# Altium PCB PCB.PcbDoc (part 1 of 2)
Units mm, origin at the board's own origin, x right, y up, seen from the top; angles counter-clockwise.
Board outline 75 x 95 mm, 2 copper layers (Top Layer, Bottom Layer); 84 components, 62 nets, 346 pads, 109 vias.
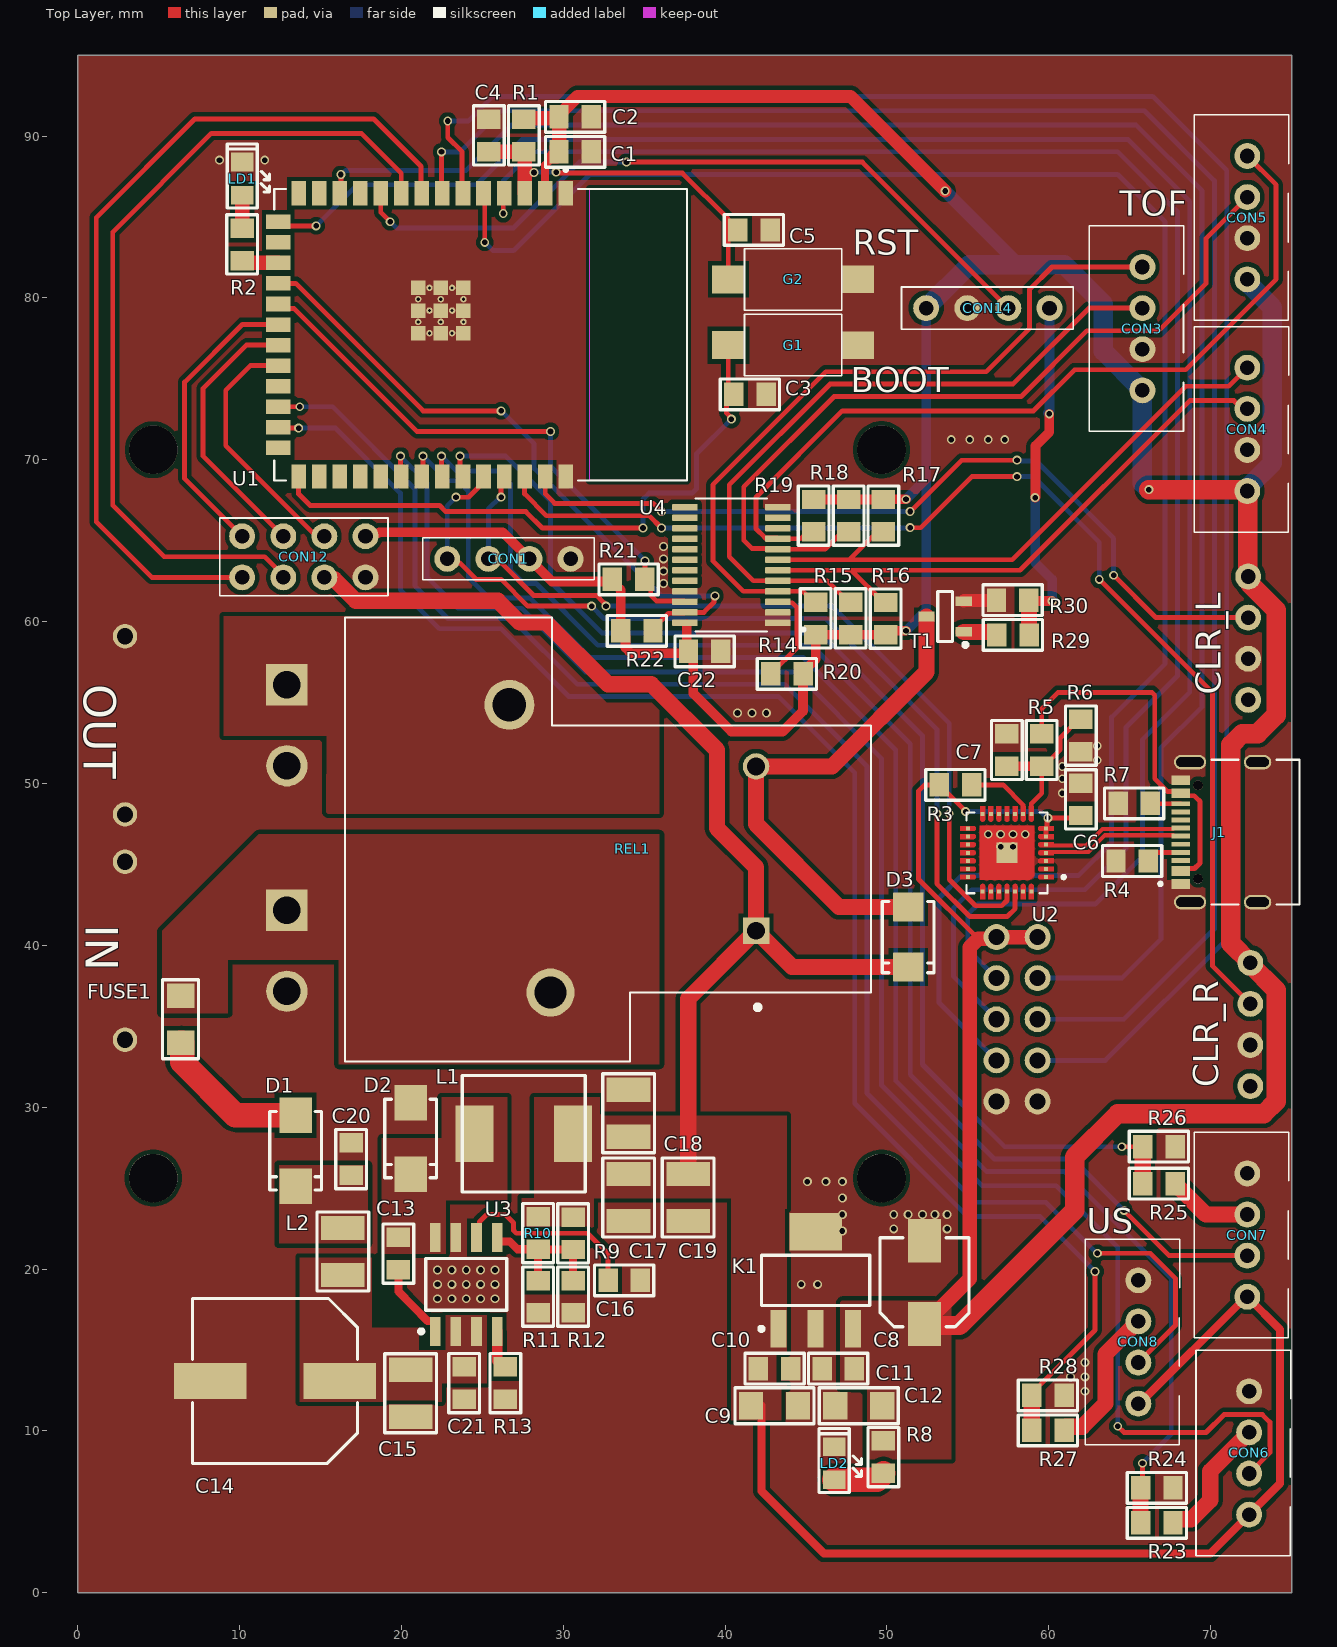
[diagram p0: Top Layer view]
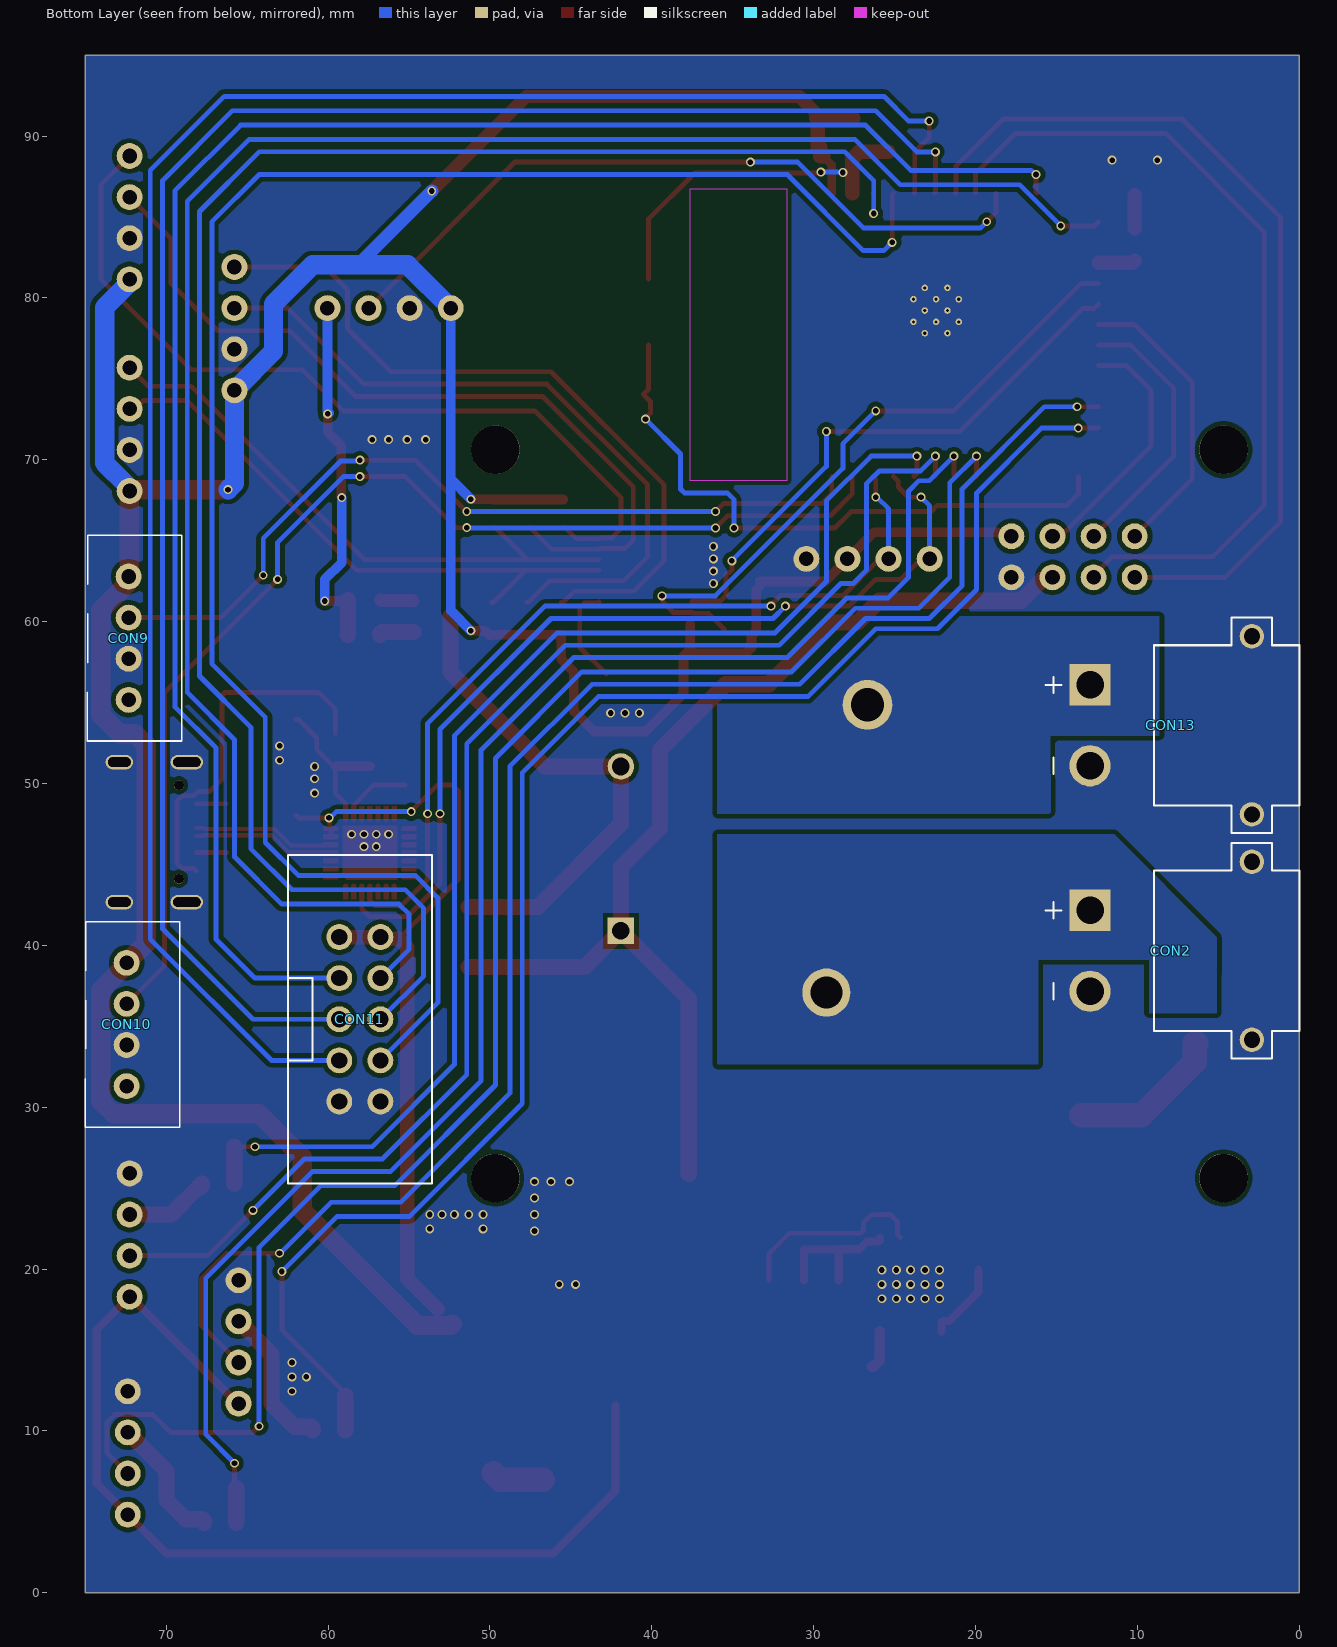
[diagram p1: Bottom Layer view, seen from below]

## Layer stack, top to bottom
Top Solder: solder mask 0.0102, Solder Resist, Dk 3.5
Top Layer: signal copper 0.0356
Dielectric 1: dielectric 0.32, FR-4, Dk 4.8
Bottom Layer: signal copper 0.0356
Bottom Solder: solder mask 0.0102, Solder Resist, Dk 3.5

## Board outline
0.001,0 75.002,0 75.002,94.996 0.001,94.996

## Design rules (kind name [scope] priority, off if disabled: settings)
AssemblyTestPointUsage [All] p1: isadvanced=TRUE
AssemblyTestpoint [All] p1: isadvanced=TRUE testpointundercomponent=TRUE minsize=1.016 maxsize=2.54 preferedsize=1.524 minholesize=0 maxholesize=1.016 preferedholesize=0.813 testpointgrid=0.025 usegrid=TRUE gridtolerance=0 allowsidetop=TRUE allowsidebottom=TRUE
Clearance Clearance_1 [InNamedPolygon('+3.3_L01_P004') Or InNamedPolygon('+5_L01_P003') Or InNamedPolygon('+12_L01_P008') Or InNamedPolygon('GND_L01_P009') Or InNamedPolygon('NETC13_2_L01_P001') Or InNamedPolygon('NETC14_1_L01_P002') Or InNamedPolygon('NETC20_2_L01_P000') Or InNamedPolygon('NETCON13_P_L01_P007') Or InNamedPolygon('+12_L02_P005') Or InNamedPolygon('GND_L02_P010') Or InNamedPolygon('NETCON13_P_L02_P006')] p1: isadvanced=TRUE gap=0.254 ignorepadtopadclearanceinfootprint=FALSE except(0.28: Arc-Poly Track-Poly SMDPad-Poly THPad-Poly Via-Poly Fill-Poly Poly-Poly)
Clearance Clearance_1 [OnMid vs OnMid] p2: gap=0.15 ignorepadtopadclearanceinfootprint=FALSE except(0.127: Arc-Arc Arc-Track Arc-Text Track-Track Track-Text Text-Text; 0.2: Arc-Hole Track-Hole SMDPad-Hole THPad-Hole Via-Hole Fill-Hole Poly-Hole Region-Hole Text-Hole; 0.254: Hole-Hole) sourcerule=42 cellrowname=All cellrowtype=0 cellcolname=All cellcoltype=0 innerlayers=TRUE
Clearance Clearance_2 [(ExistsOnLayer('Top Layer') Or ExistsOnLayer('Bottom Layer')) vs (ExistsOnLayer('Top Layer') Or ExistsOnLayer('Bottom Layer'))] p3: gap=0.15 ignorepadtopadclearanceinfootprint=FALSE except(0.127: Arc-Arc Arc-Track Arc-Text Track-Track Track-Text Text-Text; 0.2: Arc-Hole Track-Hole SMDPad-Hole THPad-Hole Via-Hole Fill-Hole Poly-Hole Region-Hole Text-Hole; 0.254: Hole-Hole) sourcerule=42 cellrowname=All cellrowtype=0 cellcolname=All cellcoltype=0 outerlayers=TRUE
Clearance [All] p4: gap=0.254 ignorepadtopadclearanceinfootprint=FALSE ismatrix=TRUE
ComponentClearance [All] p1: isadvanced=TRUE gap=0.254 collisioncheckmode=3 verticalgap=0.254 showdistances=FALSE
DiffPairsRouting "Schematic Differential Pairs Routing" [InDifferentialPairClass('All Differential Pairs')] p1: maxlimit=0.127 minlimit=0.127 mostfreqgap=0.127 toplayer_minwidth=0.255 toplayer_maxwidth=0.255 toplayer_prefwidth=0.255 bottomlayer_minwidth=0.255 bottomlayer_maxwidth=0.255 bottomlayer_prefwidth=0.255 maxuncoupledlength=12.7
DiffPairsRouting [All] p2: maxlimit=0.254 minlimit=0.254 mostfreqgap=0.254 toplayer_minwidth=0.381 toplayer_maxwidth=0.381 toplayer_prefwidth=0.381 bottomlayer_minwidth=0.381 bottomlayer_maxwidth=0.381 bottomlayer_prefwidth=0.381 maxuncoupledlength=12.7
FabricationTestPointUsage [All] p1: isadvanced=TRUE valid=0 allowmultiple=FALSE
FabricationTestpoint [All] p1: isadvanced=TRUE side=3 testpointundercomponent=TRUE minsize=1.016 maxsize=2.54 preferedsize=1.524 minholesize=0 maxholesize=1.016 preferedholesize=0.813 testpointgrid=0.025 allowsidetop=TRUE allowsidebottom=TRUE usegrid=TRUE gridtolerance=0
FanoutControl Fanout_BGA [IsBGA] p1: isadvanced=TRUE bgadir=Out bgaviamode=Centered fanoutstyle=Auto fanoutdirection=Alternating viagrid=0.025 // Fanout_BGA (Default Rule)
FanoutControl Fanout_LCC [IsLCC] p2: isadvanced=TRUE bgadir=Out bgaviamode=Centered fanoutstyle=Auto fanoutdirection=Alternating viagrid=0.025 // Fanout_LCC (Default Rule)
FanoutControl Fanout_SOIC [IsSOIC] p3: isadvanced=TRUE bgadir=Out bgaviamode=Centered fanoutstyle=Auto fanoutdirection=Alternating viagrid=0.025 // Fanout_SOIC (Default Rule)
FanoutControl Fanout_Small [(CompPinCount < 5)] p4: isadvanced=TRUE bgadir=Out bgaviamode=Centered fanoutstyle=Auto fanoutdirection=OutThenIn viagrid=0.025 // Fanout_Small (Default Rule)
FanoutControl Fanout_Default [All] p5: isadvanced=TRUE bgadir=Out bgaviamode=Centered fanoutstyle=Auto fanoutdirection=Alternating viagrid=0.025 // Fanout_Default (Default Rule)
Height [All] p1: isadvanced=TRUE minheight=0 maxheight=25.4 prefheight=12.7
HoleSize [All] p1: isadvanced=TRUE absolutevalues=TRUE maxlimit=6.3 minlimit=0.2 maxpercent=80.000 minpercent=20.000
HoleToHoleClearance [All] p1: isadvanced=TRUE gap=0.3 allowstackedmicrovias=TRUE
LayerPairs [All] p1: isadvanced=TRUE enforce=TRUE
MinimumSolderMaskSliver [All] p1: isadvanced=TRUE minsoldermaskwidth=0
NetAntennae [All] p1: isadvanced=TRUE netantennaetolerance=0
PasteMaskExpansion [All] p1: isadvanced=TRUE expansion=0
PlaneClearance [All] p1: isadvanced=TRUE clearance=0.508
PlaneConnect [All] p1: isadvanced=TRUE planeconnectstyle=Relief reliefexpansion=0.508 reliefentries=4 reliefconductorwidth=0.254 reliefairgap=0.254
PolygonConnect [All] p1: connectstyle=Direct reliefconductorwidth=0.254 reliefentries=4 polygonreliefangle="90 Angle" airgapwidth=0.254
RoutingCorners [All] p1: isadvanced=TRUE cornerstyle=45-Degree minsetback=2.54 maxsetback=2.54
RoutingPriority [All] p1: isadvanced=TRUE routingpriority=0
RoutingVias [All] p1: holewidth=0.35 width=0.55 viastyle="Through Hole" minholewidth=0.35 minwidth=0.55 maxholewidth=0.35 maxwidth=0.55
ShortCircuit [All] p1: isadvanced=TRUE allowed=FALSE
SilkToSilkClearance [All] p1: isadvanced=TRUE silktosilkclearance=0.127
SilkToSolderMaskClearance [IsPad] p1: isadvanced=TRUE minsilkscreentomaskgap=0 clearancetoexposedcopper=TRUE
SolderMaskExpansion [All] p1: isadvanced=TRUE expansion=0.051 istentingtop=FALSE
SupplyNets "Schematic Supply Nets_3" [InNet('+12')] p1: isadvanced=TRUE voltage=0.000
SupplyNets "Schematic Supply Nets_2" [InNet('+5')] p2: isadvanced=TRUE voltage=0.000
SupplyNets "Schematic Supply Nets_1" [InNet('+3.3')] p3: isadvanced=TRUE voltage=0.000
SupplyNets "Schematic Supply Nets" [InNet('GND')] p4: isadvanced=TRUE voltage=0.000
UnRoutedNet [All] p1: isadvanced=TRUE
UnpouredPolygon [All] p1: isadvanced=TRUE
Width [All] p1: maxlimit=5.008 minlimit=0.127 preferedwidth=0.254 minimp=50.000000 maximp=50.000000 favimp=50.000000
3 further rules are at their usual default settings.

## Classes and differential pairs
component class Killswitch: CON14 D3 R29 R30 REL1 T1
component class Power: C8 C9 C10 C11 C12 C13 C14 C15 C16 C17 C18 C19 C20 C21 D1 D2 FUSE1 K1 L1 L2 LD2 R8 R9 R10 R11 R12 R13 U3
component class MCU: C1 C2 C3 C4 C5 C6 C7 CON1 G1 G2 J1 LD1 R1 R2 R3 R4 R5 R6 R7 U1 U2
component class Interface: C22 CON2 CON3 CON4 CON5 CON6 CON7 CON8 CON9 CON10 CON11 CON12 CON13 R14 R15 R16 R17 R18 R19 R20 R21 R22 R23 R24 R25 R26 R27 R28 U4
differential pair D: +D_P -D_N

## Components (designator, comment, footprint, x,y, rotation, side; value= is the part's Value field where it differs from the comment)
C1 "100nF" CAP_0805 30.734,89.027 r180 top
C2 "10uF" CAP_0805 30.734,91.186 r180 top
C3 "100nF" CAP_0805 41.529,74.041 r180 top
C4 "1uF" CAP_0805 25.4,90.043 r270 top
C5 "100nF" CAP_0805 41.783,84.201 r180 top
C6 "10uF" CAP_0805 61.976,49.022 r270 top
C7 "1uF" CAP_0805 57.404,52.07 r270 top
C8 "10uf" CAP_CAN_D5MM 52.324,19.177 r90 top
C9 "1uF" CAP_1206 43.053,11.557 r180 top
C10 "100nF" CAP_0805 43.053,13.843 r180 top
C11 "100nF" CAP_0805 46.99,13.843 r0 top
C12 "1uF" CAP_1206 48.26,11.557 r0 top
C13 "100nF 50V" CAP_0805 19.812,20.955 r90 top
C14 "47uf 100v" CAP_CAN_D10mm 12.192,13.081 r180 top
C15 "10uF 100V" CAP_1210 20.574,12.319 r90 top
C16 "100nF 50V" CAP_0805 33.766,19.304 r180 top
C17 "CS3225X7R476K160NRL" CAP_1210 34.036,24.418 r90 top
C18 "CS3225X7R476K160NRL" CAP_1210 34.036,29.625 r270 top
C19 "CS3225X7R476K160NRL" CAP_1210 37.719,24.418 r90 top
C20 "100nF 100V" CAP_0805 16.891,26.797 r270 top
C21 "100nF 100V" CAP_0805 23.876,12.954 r90 top
C22 "100nF" CAP_0805 38.735,58.166 r0 top
CON1 "1x4 2.54mm THT" CON_1x4_2.54MM_THT 26.67,63.881 r270 top
CON2 "Changzhou Amass Elec XT30PW-M30.G.Y" XT30PW-M30.G.Y 7.112,39.79 r270 bottom
CON3 "HX2.54mm connector" CON_1x4_HX2.54mm#1 65.405,78.105 r180 top
CON4 "HX2.54mm connector" CON_1x4_HX2.54mm#1 71.882,71.882 r180 top
CON5 "HX2.54mm connector" CON_1x4_HX2.54mm#1 71.882,84.963 r180 top
CON6 "HX2.54mm connector" CON_1x4_HX2.54mm#2 72.009,8.636 r180 top
CON7 "HX2.54mm connector" CON_1x4_HX2.54mm#1 71.882,22.098 r180 top
CON8 "HX2.54mm connector" CON_1x4_HX2.54mm#1 65.151,15.494 r180 top
CON9 "HX2.54mm connector" CON_1x4_HX2.54mm#2 71.952,58.979 r180 bottom
CON10 "HX2.54mm connector" CON_1x4_HX2.54mm#2 72.079,35.113 r180 bottom
CON11 "BOOMELE(Boom Precision Elec) 2.54-2*5P" CON_IDC_2x5_2.54 56.769,40.513 r270 bottom
CON12 "2x4 2.54mm THT" CON_2x4_2.54MM_THT 13.97,64.008 r0 top
CON13 "Changzhou Amass Elec XT30PW-M30.G.Y" XT30PW-M30.G.Y 7.112,53.721 r270 bottom
CON14 "1x4 2.54mm THT" CON_1x4_2.54MM_THT 56.261,79.375 r270 top
D1 "SS510F" SMAF 13.462,27.305 r90 top
D2 "SS510F" SMAF 20.574,28.067 r90 top
D3 "SS16" DO-214AC 51.308,40.513 r90 top
FUSE1 "4A" FUSE_1206 6.35,35.433 r270 top
G1 "Push_Button" Push_Button 44.196,77.089 r180 top
G2 "Push_Button" Push_Button 44.196,81.153 r180 top
J1 "SHOU HAN TYPE-C 16PIN 2MD(073)" HRO_TYPE-C-31-M-12 72.898,46.997 r90 top
K1 "MIC39100-3.3WS" SOT223-4 45.593,19.304 r90 top
L1 "FXL0630-8R2-M" IND_FXL06 27.559,28.355 r0 top
L2 "10uH 1.2A" IND_1210 16.383,21.082 r270 top
LD1 "LED_0805" LED_0805 10.16,87.376 r270 top
LD2 "LED_0805" LED_0805 46.736,8.001 r270 top
R1 "10k" RES_0805 27.559,90.043 r90 top
R2 "*" RES_0805 10.16,83.312 r270 top
R3 "1k" RES_0805 54.229,49.911 r180 top
R4 "*" RES_0805 65.151,45.212 r180 top
R5 "22.1k" RES_0805 59.563,52.07 r90 top
R6 "47.5k" RES_0805 61.976,52.959 r270 top
R7 "*" RES_0805 65.278,48.768 r0 top
R8 "10k" RES_0805 49.784,8.382 r90 top
R9 "10k" RES_0805 30.607,22.209 r90 top
R10 "NC" RES_0805 28.448,22.225 r90 top
R11 "2k" RES_0805 28.448,18.288 r270 top
R12 "15k" RES_0805 30.607,18.288 r270 top
R13 "10k" RES_0805 26.416,12.954 r90 top
R14 "5k" RES_0805 45.593,60.198 r270 top
R15 "5k" RES_0805 47.752,60.198 r270 top
R16 "5k" RES_0805 49.911,60.182 r270 top
R17 "5k" RES_0805 49.784,66.548 r90 top
R18 "5k" RES_0805 47.625,66.548 r90 top
R19 "5k" RES_0805 45.466,66.548 r90 top
R20 "10k" RES_0805 43.815,56.769 r0 top
R21 "5k" RES_0805 34.036,62.611 r180 top
R22 "5k" RES_0805 34.544,59.436 r180 top
R23 "1k" RES_0805 66.675,4.318 r0 top
R24 "1k" RES_0805 66.675,6.477 r180 top
R25 "1k" RES_0805 66.802,25.273 r0 top
R26 "1k" RES_0805 66.802,27.559 r180 top
R27 "1k" RES_0805 59.944,10.033 r0 top
R28 "1k" RES_0805 59.944,12.192 r180 top
R29 "470" RES_0805 57.785,59.177 r180 top
R30 "4k7" RES_0805 57.769,61.336 r180 top
REL1 "Songle Relay SLA-05VDC-SL-A" TE_1-1393210-3 41.91,40.894 r90 top
T1 "DMN3404L-7" SOT23-3 53.594,60.32 r0 top
U1 "ESPRESSIF ESP32-S3-WROOM-1-N16R2" XCVR_ESP32-S3-WROOM-1-N16R2 24.892,77.724 r270 top
U2 "SILICON LABS CP2102N-A02-GQFN28R" IC_CP2102N-A02-GQFN28R 57.417,45.72 r180 top
U3 "LMR16030SDDAR" SOIC8_T 24.003,19.05 r90 top
U4 "TI TCA9548APWR" SOP65P640X120-24N 40.386,63.5 r180 top

## Footprints (in the part's own frame and the unit in brackets; to place one, negate y for a bottom-side part, rotate by r counter-clockwise, add the part's x,y. Pads: shape width x height; smd on the part's side, far side on the other; paste and mask are expansions set on the pad)
CAP_0805 [mm] "Chip Capacitor, 2-Leads, Body 2,03x1,35mm, IPC Medium Density"
  rect 1.2x1.45 smd: 1(-1,0) 2(1,0)
  silkscreen extent -1.83,-0.95 1.83,0.95, body extent -1.02,-0.7 1.02,0.7, height 1.3
CAP_1206 [mm] "Chip Capacitor, 2-Leads, Body 3,05x1,56mm, IPC Medium Density"
  rect 1.5x1.7 smd: 1(-1.45,0) 2(1.45,0)
  silkscreen extent -2.44,-1.11 2.44,1.11, body extent -1.53,-0.8 1.53,0.8, height 0.8
CAP_1210 [mm] "Chip Capacitor, 2-Leads, Body 3,05x1,56mm, IPC Medium Density"
  rect 1.5x2.7 smd: 1(-1.45,0) 2(1.45,0)
  silkscreen extent -2.44,-1.6 2.44,1.6, body extent -1.7,-1.4 1.7,1.4, height 2.5
CAP_CAN_D5MM [mm] "Aluminum Electrolytic Capacitor, Body 5,40x5,40x5,50mm, IPC Low Density"
  rect 2.7x2.05 smd: 1(-2.575,0) 2(2.575,0)
  silkscreen extent -2.75,-2.75 2.75,2.75, body extent -2.75,-2.75 2.75,2.75, height 5.5
CAP_CAN_D10mm [mm] "Aluminum Electrolytic Capacitor, Body 5,40x5,40x5,50mm, IPC Low Density"
  rect 4.5x2.2 smd: 1(-4,0) 2(4,0)
  silkscreen extent -5.1,-5.1 5.1,5.1, body extent -5,-5 5,5, height 10.4
CON_1x4_2.54MM_THT [mm] "Chip Resistor, 2-Leads, Body 5,20x3,30mm, IPC Medium Density"
  round 1.6 hole 0.9: 1(0,3.78) 2(0,1.24) 3(0,-1.3) 4(0,-3.84)
  silkscreen extent -1.3,-5.36 1.3,5.24, body extent -1,-5.06 1,4.94, height 6.3
CON_1x4_HX2.54mm#1 [mm]
  round 1.6 hole 0.9: 1(-0.381,3.81) 2(-0.381,1.27) 3(-0.381,-1.27) 4(-0.381,-3.81)
  silkscreen extent -2.94,-6.35 2.9,6.35, body extent -2.63,-6.07 2.61,6.02, height 6.3
CON_1x4_HX2.54mm#2 [mm]
  round 1.6 hole 0.9: 1(-0.37,3.81) 2(-0.37,1.27) 3(-0.37,-1.27) 4(-0.37,-3.81)
  silkscreen extent -2.93,-6.35 2.91,6.35, body extent -2.62,-6.07 2.62,6.02, height 6.3
CON_2x4_2.54MM_THT [mm]
  round 1.6 hole 0.9: 1(-3.81,1.27) 2(-3.81,-1.27) 3(-1.27,1.27) 4(-1.27,-1.27) 5(1.27,1.27) 6(1.27,-1.27) 7(3.81,1.27) 8(3.81,-1.27)
  silkscreen extent -5.2,-2.4 5.2,2.4, body extent -5,-2.2 5,2.2, height 8.3
CON_IDC_2x5_2.54 [mm]
  round 1.6 hole 1: 1(0,0) 2(2.54,0) 3(5.08,0) 4(7.62,0) 5(10.16,0) 6(0,-2.54) 7(2.54,-2.54) 8(5.08,-2.54) 9(7.62,-2.54) 10(10.16,-2.54)
  silkscreen extent -5.08,-5.72 15.24,3.18, body extent -5.08,-5.72 15.27,3.18, height 0.9
DO-214AC [mm] "SODFL, 2-Leads, Body 1,30x2,50mm, IPC Medium Density"
  rect 1.8x1.9 smd: 1(-1.85,0) 2(1.85,0)
  silkscreen extent -2.2,-1.6 2.2,1.6, body extent -2,-1.4 2,1.4, height 2.3
FUSE_1206 [mm]
  rect 1.5x1.7 smd: 1(-1.45,0) 2(1.45,0)
  silkscreen extent -2.44,-1.11 2.44,1.11, body extent -1.53,-0.8 1.53,0.8, height 0.8
HRO_TYPE-C-31-M-12 [mm]
  rect 0.6x1.14 smd mask+0.05: A1_B12(-3.2,4.75) A4_B9(-2.4,4.75) B1_A12(3.2,4.75) B4_A9(2.4,4.75)
  rect 0.3x1.14 smd mask+0.05: A5(-1.25,4.75) A6(-0.25,4.75) A7(0.25,4.75) A8(1.25,4.75) B5(1.75,4.75) B6(0.75,4.75) B7(-0.75,4.75) B8(-1.75,4.75)
  oval 0.9x2 hole 0.6 slot 1.7 at 90 deg: S1(-4.325,4.17) S2(4.325,4.17)
  oval 0.9x1.7 hole 0.6 slot 1.4 at 90 deg: S3(-4.325,0) S4(4.325,0)
  round 0.6 hole 0.6 unplated: ""(-2.89,3.68) ""(2.89,3.68)
  silkscreen extent -4.47,-2.6 4.47,6.1, body extent -4.47,-2.6 4.47,5.31, height 3.31
IC_CP2102N-A02-GQFN28R [mm]
  rect 0.25x0.25 smd paste-1 mask+0: 1(-2.4,1.5) 2(-2.4,1) 3(-2.4,0.5) 4(-2.4,0) 5(-2.4,-0.5) 6(-2.4,-1) 7(-2.4,-1.5) 8(-1.5,-2.4) 9(-1,-2.4) 10(-0.5,-2.4) 11(0,-2.4) 12(0.5,-2.4) 13(1,-2.4) 14(1.5,-2.4) 15(2.4,-1.5) 16(2.4,-1) 17(2.4,-0.5) 18(2.4,0) 19(2.4,0.5) 20(2.4,1) 21(2.4,1.5) 22(1.5,2.4) 23(1,2.4) 24(0.5,2.4) 25(0,2.4) 26(-0.5,2.4) 27(-1,2.4) 28(-1.5,2.4)
  rect 1.27x1.27 smd paste+0.424 mask+0: 29(0,0)
  Top Layer region: -2.059,0.649 -2.052,0.648 -2.044,0.647 -2.036,0.645 -2.029,0.643 -2.021,0.64 -2.014,0.637 -2.007,0.634 -2,0.63 -1.993,0.626 -1.987,0.621 -1.981,0.617 -1.975,0.611 -1.969,0.606 -1.964,0.6 -1.958,0.594 -1.954,0.588 -1.949,0.582 -1.945,0.575 -1.941,0.568 -1.938,0.561 -1.935,0.554 -1.932,0.546 -1.93,0.539 -1.928,0.531 -1.927,0.523 -1.926,0.516 -1.925,0.508 -1.925,0.5 -1.925,0.492 -1.926,0.484 -1.927,0.477 -1.928,0.469 -1.93,0.461 -1.932,0.454 -1.935,0.446 -1.938,0.439 -1.941,0.432 -1.945,0.425 -1.949,0.418 -1.954,0.412 -1.958,0.406 -1.964,0.4 -1.969,0.394 -1.975,0.389 -1.981,0.383 -1.987,0.379 -1.993,0.374 -2,0.37 -2.007,0.366 -2.014,0.363 -2.021,0.36 -2.029,0.357 -2.036,0.355 -2.044,0.353 -2.052,0.352 -2.059,0.351 -2.067,0.35 -2.875,0.35 -2.875,0.65 -2.067,0.65
  Top Layer region: 1.675,-1.675 -1.675,-1.675 -1.675,1.425 -1.425,1.675 1.675,1.675
  Top Layer region: -1.35,2.075 -1.35,2.067 -1.351,2.059 -1.352,2.052 -1.353,2.044 -1.355,2.036 -1.357,2.029 -1.36,2.021 -1.363,2.014 -1.366,2.007 -1.37,2 -1.374,1.993 -1.379,1.987 -1.383,1.981 -1.389,1.975 -1.394,1.969 -1.4,1.964 -1.406,1.958 -1.412,1.954 -1.418,1.949 -1.425,1.945 -1.432,1.941 -1.439,1.938 -1.446,1.935 -1.454,1.932 -1.461,1.93 -1.469,1.928 -1.477,1.927 -1.484,1.926 -1.492,1.925 -1.508,1.925 -1.516,1.926 -1.523,1.927 -1.531,1.928 -1.539,1.93 -1.546,1.932 -1.554,1.935 -1.561,1.938 -1.568,1.941 -1.575,1.945 -1.582,1.949 -1.588,1.954 -1.594,1.958 -1.6,1.964 -1.606,1.969 -1.611,1.975 -1.617,1.981 -1.621,1.987 -1.626,1.993 -1.63,2 -1.634,2.007 -1.637,2.014 -1.64,2.021 -1.643,2.029 -1.645,2.036 -1.647,2.044 -1.648,2.052 -1.649,2.059 -1.65,2.067 -1.65,2.075 -1.65,2.875 -1.35,2.875
  Top Layer region: -0.85,2.075 -0.85,2.067 -0.851,2.059 -0.852,2.052 -0.853,2.044 -0.855,2.036 -0.857,2.029 -0.86,2.021 -0.863,2.014 -0.866,2.007 -0.87,2 -0.874,1.993 -0.879,1.987 -0.883,1.981 -0.889,1.975 -0.894,1.969 -0.9,1.964 -0.906,1.958 -0.912,1.954 -0.918,1.949 -0.925,1.945 -0.932,1.941 -0.939,1.938 -0.946,1.935 -0.954,1.932 -0.961,1.93 -0.969,1.928 -0.977,1.927 -0.984,1.926 -0.992,1.925 -1.008,1.925 -1.016,1.926 -1.023,1.927 -1.031,1.928 -1.039,1.93 -1.046,1.932 -1.054,1.935 -1.061,1.938 -1.068,1.941 -1.075,1.945 -1.082,1.949 -1.088,1.954 -1.094,1.958 -1.1,1.964 -1.106,1.969 -1.111,1.975 -1.117,1.981 -1.121,1.987 -1.126,1.993 -1.13,2 -1.134,2.007 -1.137,2.014 -1.14,2.021 -1.143,2.029 -1.145,2.036 -1.147,2.044 -1.148,2.052 -1.149,2.059 -1.15,2.067 -1.15,2.075 -1.15,2.875 -0.85,2.875
  Top Layer region: 0.65,2.075 0.65,2.067 0.649,2.059 0.648,2.052 0.647,2.044 0.645,2.036 0.643,2.029 0.64,2.021 0.637,2.014 0.634,2.007 0.63,2 0.626,1.993 0.621,1.987 0.617,1.981 0.611,1.975 0.606,1.969 0.6,1.964 0.594,1.958 0.588,1.954 0.582,1.949 0.575,1.945 0.568,1.941 0.561,1.938 0.554,1.935 0.546,1.932 0.539,1.93 0.531,1.928 0.523,1.927 0.516,1.926 0.508,1.925 0.492,1.925 0.484,1.926 0.477,1.927 0.469,1.928 0.461,1.93 0.454,1.932 0.446,1.935 0.439,1.938 0.432,1.941 0.425,1.945 0.418,1.949 0.412,1.954 0.406,1.958 0.4,1.964 0.394,1.969 0.389,1.975 0.383,1.981 0.379,1.987 0.374,1.993 0.37,2 0.366,2.007 0.363,2.014 0.36,2.021 0.357,2.029 0.355,2.036 0.353,2.044 0.352,2.052 0.351,2.059 0.35,2.067 0.35,2.075 0.35,2.875 0.65,2.875
  Top Layer region: 1.15,2.075 1.15,2.067 1.149,2.059 1.148,2.052 1.147,2.044 1.145,2.036 1.143,2.029 1.14,2.021 1.137,2.014 1.134,2.007 1.13,2 1.126,1.993 1.121,1.987 1.117,1.981 1.111,1.975 1.106,1.969 1.1,1.964 1.094,1.958 1.088,1.954 1.082,1.949 1.075,1.945 1.068,1.941 1.061,1.938 1.054,1.935 1.046,1.932 1.039,1.93 1.031,1.928 1.023,1.927 1.016,1.926 1.008,1.925 0.992,1.925 0.984,1.926 0.977,1.927 0.969,1.928 0.961,1.93 0.954,1.932 0.946,1.935 0.939,1.938 0.932,1.941 0.925,1.945 0.918,1.949 0.912,1.954 0.906,1.958 0.9,1.964 0.894,1.969 0.889,1.975 0.883,1.981 0.879,1.987 0.874,1.993 0.87,2 0.866,2.007 0.863,2.014 0.86,2.021 0.857,2.029 0.855,2.036 0.853,2.044 0.852,2.052 0.851,2.059 0.85,2.067 0.85,2.075 0.85,2.875 1.15,2.875
  Top Layer region: 2.875,1.35 2.067,1.35 2.059,1.351 2.052,1.352 2.044,1.353 2.036,1.355 2.029,1.357 2.021,1.36 2.014,1.363 2.007,1.366 2,1.37 1.993,1.374 1.987,1.379 1.981,1.383 1.975,1.389 1.969,1.394 1.964,1.4 1.958,1.406 1.954,1.412 1.949,1.418 1.945,1.425 1.941,1.432 1.938,1.439 1.935,1.446 1.932,1.454 1.93,1.461 1.928,1.469 1.927,1.477 1.926,1.484 1.925,1.492 1.925,1.5 1.925,1.508 1.926,1.516 1.927,1.523 1.928,1.531 1.93,1.539 1.932,1.546 1.935,1.554 1.938,1.561 1.941,1.568 1.945,1.575 1.949,1.582 1.954,1.588 1.958,1.594 1.964,1.6 1.969,1.606 1.975,1.611 1.981,1.617 1.987,1.621 1.993,1.626 2,1.63 2.007,1.634 2.014,1.637 2.021,1.64 2.029,1.643 2.036,1.645 2.044,1.647 2.052,1.648 2.059,1.649 2.067,1.65 2.875,1.65
  Top Layer region: 2.875,0.85 2.067,0.85 2.059,0.851 2.052,0.852 2.044,0.853 2.036,0.855 2.029,0.857 2.021,0.86 2.014,0.863 2.007,0.866 2,0.87 1.993,0.874 1.987,0.879 1.981,0.883 1.975,0.889 1.969,0.894 1.964,0.9 1.958,0.906 1.954,0.912 1.949,0.918 1.945,0.925 1.941,0.932 1.938,0.939 1.935,0.946 1.932,0.954 1.93,0.961 1.928,0.969 1.927,0.977 1.926,0.984 1.925,0.992 1.925,1 1.925,1.008 1.926,1.016 1.927,1.023 1.928,1.031 1.93,1.039 1.932,1.046 1.935,1.054 1.938,1.061 1.941,1.068 1.945,1.075 1.949,1.082 1.954,1.088 1.958,1.094 1.964,1.1 1.969,1.106 1.975,1.111 1.981,1.117 1.987,1.121 1.993,1.126 2,1.13 2.007,1.134 2.014,1.137 2.021,1.14 2.029,1.143 2.036,1.145 2.044,1.147 2.052,1.148 2.059,1.149 2.067,1.15 2.875,1.15
  Top Layer region: 2.875,0.35 2.067,0.35 2.059,0.351 2.052,0.352 2.044,0.353 2.036,0.355 2.029,0.357 2.021,0.36 2.014,0.363 2.007,0.366 2,0.37 1.993,0.374 1.987,0.379 1.981,0.383 1.975,0.389 1.969,0.394 1.964,0.4 1.958,0.406 1.954,0.412 1.949,0.418 1.945,0.425 1.941,0.432 1.938,0.439 1.935,0.446 1.932,0.454 1.93,0.461 1.928,0.469 1.927,0.477 1.926,0.484 1.925,0.492 1.925,0.5 1.925,0.508 1.926,0.516 1.927,0.523 1.928,0.531 1.93,0.539 1.932,0.546 1.935,0.554 1.938,0.561 1.941,0.568 1.945,0.575 1.949,0.582 1.954,0.588 1.958,0.594 1.964,0.6 1.969,0.606 1.975,0.611 1.981,0.617 1.987,0.621 1.993,0.626 2,0.63 2.007,0.634 2.014,0.637 2.021,0.64 2.029,0.643 2.036,0.645 2.044,0.647 2.052,0.648 2.059,0.649 2.067,0.65 2.875,0.65
  Top Layer region: 2.875,-0.15 2.067,-0.15 2.059,-0.149 2.052,-0.148 2.044,-0.147 2.036,-0.145 2.029,-0.143 2.021,-0.14 2.014,-0.137 2.007,-0.134 2,-0.13 1.993,-0.126 1.987,-0.121 1.981,-0.117 1.975,-0.111 1.969,-0.106 1.964,-0.1 1.958,-0.094 1.954,-0.088 1.949,-0.082 1.945,-0.075 1.941,-0.068 1.938,-0.061 1.935,-0.054 1.932,-0.046 1.93,-0.039 1.928,-0.031 1.927,-0.023 1.926,-0.016 1.925,-0.008 1.925,0 1.925,0.008 1.926,0.016 1.927,0.023 1.928,0.031 1.93,0.039 1.932,0.046 1.935,0.054 1.938,0.061 1.941,0.068 1.945,0.075 1.949,0.082 1.954,0.088 1.958,0.094 1.964,0.1 1.969,0.106 1.975,0.111 1.981,0.117 1.987,0.121 1.993,0.126 2,0.13 2.007,0.134 2.014,0.137 2.021,0.14 2.029,0.143 2.036,0.145 2.044,0.147 2.052,0.148 2.059,0.149 2.067,0.15 2.875,0.15
  Top Layer region: 2.875,-0.65 2.067,-0.65 2.059,-0.649 2.052,-0.648 2.044,-0.647 2.036,-0.645 2.029,-0.643 2.021,-0.64 2.014,-0.637 2.007,-0.634 2,-0.63 1.993,-0.626 1.987,-0.621 1.981,-0.617 1.975,-0.611 1.969,-0.606 1.964,-0.6 1.958,-0.594 1.954,-0.588 1.949,-0.582 1.945,-0.575 1.941,-0.568 1.938,-0.561 1.935,-0.554 1.932,-0.546 1.93,-0.539 1.928,-0.531 1.927,-0.523 1.926,-0.516 1.925,-0.508 1.925,-0.5 1.925,-0.492 1.926,-0.484 1.927,-0.477 1.928,-0.469 1.93,-0.461 1.932,-0.454 1.935,-0.446 1.938,-0.439 1.941,-0.432 1.945,-0.425 1.949,-0.418 1.954,-0.412 1.958,-0.406 1.964,-0.4 1.969,-0.394 1.975,-0.389 1.981,-0.383 1.987,-0.379 1.993,-0.374 2,-0.37 2.007,-0.366 2.014,-0.363 2.021,-0.36 2.029,-0.357 2.036,-0.355 2.044,-0.353 2.052,-0.352 2.059,-0.351 2.067,-0.35 2.875,-0.35
  Top Layer region: 2.875,-1.15 2.067,-1.15 2.059,-1.149 2.052,-1.148 2.044,-1.147 2.036,-1.145 2.029,-1.143 2.021,-1.14 2.014,-1.137 2.007,-1.134 2,-1.13 1.993,-1.126 1.987,-1.121 1.981,-1.117 1.975,-1.111 1.969,-1.106 1.964,-1.1 1.958,-1.094 1.954,-1.088 1.949,-1.082 1.945,-1.075 1.941,-1.068 1.938,-1.061 1.935,-1.054 1.932,-1.046 1.93,-1.039 1.928,-1.031 1.927,-1.023 1.926,-1.016 1.925,-1.008 1.925,-1 1.925,-0.992 1.926,-0.984 1.927,-0.977 1.928,-0.969 1.93,-0.961 1.932,-0.954 1.935,-0.946 1.938,-0.939 1.941,-0.932 1.945,-0.925 1.949,-0.918 1.954,-0.912 1.958,-0.906 1.964,-0.9 1.969,-0.894 1.975,-0.889 1.981,-0.883 1.987,-0.879 1.993,-0.874 2,-0.87 2.007,-0.866 2.014,-0.863 2.021,-0.86 2.029,-0.857 2.036,-0.855 2.044,-0.853 2.052,-0.852 2.059,-0.851 2.067,-0.85 2.875,-0.85
  Top Layer region: 2.875,-1.65 2.067,-1.65 2.059,-1.649 2.052,-1.648 2.044,-1.647 2.036,-1.645 2.029,-1.643 2.021,-1.64 2.014,-1.637 2.007,-1.634 2,-1.63 1.993,-1.626 1.987,-1.621 1.981,-1.617 1.975,-1.611 1.969,-1.606 1.964,-1.6 1.958,-1.594 1.954,-1.588 1.949,-1.582 1.945,-1.575 1.941,-1.568 1.938,-1.561 1.935,-1.554 1.932,-1.546 1.93,-1.539 1.928,-1.531 1.927,-1.523 1.926,-1.516 1.925,-1.508 1.925,-1.5 1.925,-1.492 1.926,-1.484 1.927,-1.477 1.928,-1.469 1.93,-1.461 1.932,-1.454 1.935,-1.446 1.938,-1.439 1.941,-1.432 1.945,-1.425 1.949,-1.418 1.954,-1.412 1.958,-1.406 1.964,-1.4 1.969,-1.394 1.975,-1.389 1.981,-1.383 1.987,-1.379 1.993,-1.374 2,-1.37 2.007,-1.366 2.014,-1.363 2.021,-1.36 2.029,-1.357 2.036,-1.355 2.044,-1.353 2.052,-1.352 2.059,-1.351 2.067,-1.35 2.875,-1.35
  Top Layer region: 1.65,2.075 1.65,2.067 1.649,2.059 1.648,2.052 1.647,2.044 1.645,2.036 1.643,2.029 1.64,2.021 1.637,2.014 1.634,2.007 1.63,2 1.626,1.993 1.621,1.987 1.617,1.981 1.611,1.975 1.606,1.969 1.6,1.964 1.594,1.958 1.588,1.954 1.582,1.949 1.575,1.945 1.568,1.941 1.561,1.938 1.554,1.935 1.546,1.932 1.539,1.93 1.531,1.928 1.523,1.927 1.516,1.926 1.508,1.925 1.492,1.925 1.484,1.926 1.477,1.927 1.469,1.928 1.461,1.93 1.454,1.932 1.446,1.935 1.439,1.938 1.432,1.941 1.425,1.945 1.418,1.949 1.412,1.954 1.406,1.958 1.4,1.964 1.394,1.969 1.389,1.975 1.383,1.981 1.379,1.987 1.374,1.993 1.37,2 1.366,2.007 1.363,2.014 1.36,2.021 1.357,2.029 1.355,2.036 1.353,2.044 1.352,2.052 1.351,2.059 1.35,2.067 1.35,2.075 1.35,2.875 1.65,2.875
  Top Layer region: 1.516,-1.926 1.523,-1.927 1.531,-1.928 1.539,-1.93 1.546,-1.932 1.554,-1.935 1.561,-1.938 1.568,-1.941 1.575,-1.945 1.582,-1.949 1.588,-1.954 1.594,-1.958 1.6,-1.964 1.606,-1.969 1.611,-1.975 1.617,-1.981 1.621,-1.987 1.626,-1.993 1.63,-2 1.634,-2.007 1.637,-2.014 1.64,-2.021 1.643,-2.029 1.645,-2.036 1.647,-2.044 1.648,-2.052 1.649,-2.059 1.65,-2.067 1.65,-2.075 1.65,-2.875 1.35,-2.875 1.35,-2.075 1.35,-2.067 1.351,-2.059 1.352,-2.052 1.353,-2.044 1.355,-2.036 1.357,-2.029 1.36,-2.021 1.363,-2.014 1.366,-2.007 1.37,-2 1.374,-1.993 1.379,-1.987 1.383,-1.981 1.389,-1.975 1.394,-1.969 1.4,-1.964 1.406,-1.958 1.412,-1.954 1.418,-1.949 1.425,-1.945 1.432,-1.941 1.439,-1.938 1.446,-1.935 1.454,-1.932 1.461,-1.93 1.469,-1.928 1.477,-1.927 1.484,-1.926 1.492,-1.925 1.508,-1.925
  Top Layer region: 1.016,-1.926 1.023,-1.927 1.031,-1.928 1.039,-1.93 1.046,-1.932 1.054,-1.935 1.061,-1.938 1.068,-1.941 1.075,-1.945 1.082,-1.949 1.088,-1.954 1.094,-1.958 1.1,-1.964 1.106,-1.969 1.111,-1.975 1.117,-1.981 1.121,-1.987 1.126,-1.993 1.13,-2 1.134,-2.007 1.137,-2.014 1.14,-2.021 1.143,-2.029 1.145,-2.036 1.147,-2.044 1.148,-2.052 1.149,-2.059 1.15,-2.067 1.15,-2.075 1.15,-2.875 0.85,-2.875 0.85,-2.075 0.85,-2.067 0.851,-2.059 0.852,-2.052 0.853,-2.044 0.855,-2.036 0.857,-2.029 0.86,-2.021 0.863,-2.014 0.866,-2.007 0.87,-2 0.874,-1.993 0.879,-1.987 0.883,-1.981 0.889,-1.975 0.894,-1.969 0.9,-1.964 0.906,-1.958 0.912,-1.954 0.918,-1.949 0.925,-1.945 0.932,-1.941 0.939,-1.938 0.946,-1.935 0.954,-1.932 0.961,-1.93 0.969,-1.928 0.977,-1.927 0.984,-1.926 0.992,-1.925 1.008,-1.925
  Top Layer region: 0.516,-1.926 0.523,-1.927 0.531,-1.928 0.539,-1.93 0.546,-1.932 0.554,-1.935 0.561,-1.938 0.568,-1.941 0.575,-1.945 0.582,-1.949 0.588,-1.954 0.594,-1.958 0.6,-1.964 0.606,-1.969 0.611,-1.975 0.617,-1.981 0.621,-1.987 0.626,-1.993 0.63,-2 0.634,-2.007 0.637,-2.014 0.64,-2.021 0.643,-2.029 0.645,-2.036 0.647,-2.044 0.648,-2.052 0.649,-2.059 0.65,-2.067 0.65,-2.075 0.65,-2.875 0.35,-2.875 0.35,-2.075 0.35,-2.067 0.351,-2.059 0.352,-2.052 0.353,-2.044 0.355,-2.036 0.357,-2.029 0.36,-2.021 0.363,-2.014 0.366,-2.007 0.37,-2 0.374,-1.993 0.379,-1.987 0.383,-1.981 0.389,-1.975 0.394,-1.969 0.4,-1.964 0.406,-1.958 0.412,-1.954 0.418,-1.949 0.425,-1.945 0.432,-1.941 0.439,-1.938 0.446,-1.935 0.454,-1.932 0.461,-1.93 0.469,-1.928 0.477,-1.927 0.484,-1.926 0.492,-1.925 0.508,-1.925
  Top Layer region: 0.016,-1.926 0.023,-1.927 0.031,-1.928 0.039,-1.93 0.046,-1.932 0.054,-1.935 0.061,-1.938 0.068,-1.941 0.075,-1.945 0.082,-1.949 0.088,-1.954 0.094,-1.958 0.1,-1.964 0.106,-1.969 0.111,-1.975 0.117,-1.981 0.121,-1.987 0.126,-1.993 0.13,-2 0.134,-2.007 0.137,-2.014 0.14,-2.021 0.143,-2.029 0.145,-2.036 0.147,-2.044 0.148,-2.052 0.149,-2.059 0.15,-2.067 0.15,-2.075 0.15,-2.875 -0.15,-2.875 -0.15,-2.075 -0.15,-2.067 -0.149,-2.059 -0.148,-2.052 -0.147,-2.044 -0.145,-2.036 -0.143,-2.029 -0.14,-2.021 -0.137,-2.014 -0.134,-2.007 -0.13,-2 -0.126,-1.993 -0.121,-1.987 -0.117,-1.981 -0.111,-1.975 -0.106,-1.969 -0.1,-1.964 -0.094,-1.958 -0.088,-1.954 -0.082,-1.949 -0.075,-1.945 -0.068,-1.941 -0.061,-1.938 -0.054,-1.935 -0.046,-1.932 -0.039,-1.93 -0.031,-1.928 -0.023,-1.927 -0.016,-1.926 -0.008,-1.925 0.008,-1.925
  Top Layer region: -0.484,-1.926 -0.477,-1.927 -0.469,-1.928 -0.461,-1.93 -0.454,-1.932 -0.446,-1.935 -0.439,-1.938 -0.432,-1.941 -0.425,-1.945 -0.418,-1.949 -0.412,-1.954 -0.406,-1.958 -0.4,-1.964 -0.394,-1.969 -0.389,-1.975 -0.383,-1.981 -0.379,-1.987 -0.374,-1.993 -0.37,-2 -0.366,-2.007 -0.363,-2.014 -0.36,-2.021 -0.357,-2.029 -0.355,-2.036 -0.353,-2.044 -0.352,-2.052 -0.351,-2.059 -0.35,-2.067 -0.35,-2.075 -0.35,-2.875 -0.65,-2.875 -0.65,-2.075 -0.65,-2.067 -0.649,-2.059 -0.648,-2.052 -0.647,-2.044 -0.645,-2.036 -0.643,-2.029 -0.64,-2.021 -0.637,-2.014 -0.634,-2.007 -0.63,-2 -0.626,-1.993 -0.621,-1.987 -0.617,-1.981 -0.611,-1.975 -0.606,-1.969 -0.6,-1.964 -0.594,-1.958 -0.588,-1.954 -0.582,-1.949 -0.575,-1.945 -0.568,-1.941 -0.561,-1.938 -0.554,-1.935 -0.546,-1.932 -0.539,-1.93 -0.531,-1.928 -0.523,-1.927 -0.516,-1.926 -0.508,-1.925 -0.492,-1.925
  Top Layer region: -2.059,-0.351 -2.052,-0.352 -2.044,-0.353 -2.036,-0.355 -2.029,-0.357 -2.021,-0.36 -2.014,-0.363 -2.007,-0.366 -2,-0.37 -1.993,-0.374 -1.987,-0.379 -1.981,-0.383 -1.975,-0.389 -1.969,-0.394 -1.964,-0.4 -1.958,-0.406 -1.954,-0.412 -1.949,-0.418 -1.945,-0.425 -1.941,-0.432 -1.938,-0.439 -1.935,-0.446 -1.932,-0.454 -1.93,-0.461 -1.928,-0.469 -1.927,-0.477 -1.926,-0.484 -1.925,-0.492 -1.925,-0.5 -1.925,-0.508 -1.926,-0.516 -1.927,-0.523 -1.928,-0.531 -1.93,-0.539 -1.932,-0.546 -1.935,-0.554 -1.938,-0.561 -1.941,-0.568 -1.945,-0.575 -1.949,-0.582 -1.954,-0.588 -1.958,-0.594 -1.964,-0.6 -1.969,-0.606 -1.975,-0.611 -1.981,-0.617 -1.987,-0.621 -1.993,-0.626 -2,-0.63 -2.007,-0.634 -2.014,-0.637 -2.021,-0.64 -2.029,-0.643 -2.036,-0.645 -2.044,-0.647 -2.052,-0.648 -2.059,-0.649 -2.067,-0.65 -2.875,-0.65 -2.875,-0.35 -2.067,-0.35
  Top Layer region: -2.059,0.149 -2.052,0.148 -2.044,0.147 -2.036,0.145 -2.029,0.143 -2.021,0.14 -2.014,0.137 -2.007,0.134 -2,0.13 -1.993,0.126 -1.987,0.121 -1.981,0.117 -1.975,0.111 -1.969,0.106 -1.964,0.1 -1.958,0.094 -1.954,0.088 -1.949,0.082 -1.945,0.075 -1.941,0.068 -1.938,0.061 -1.935,0.054 -1.932,0.046 -1.93,0.039 -1.928,0.031 -1.927,0.023 -1.926,0.016 -1.925,0.008 -1.925,0 -1.925,-0.008 -1.926,-0.016 -1.927,-0.023 -1.928,-0.031 -1.93,-0.039 -1.932,-0.046 -1.935,-0.054 -1.938,-0.061 -1.941,-0.068 -1.945,-0.075 -1.949,-0.082 -1.954,-0.088 -1.958,-0.094 -1.964,-0.1 -1.969,-0.106 -1.975,-0.111 -1.981,-0.117 -1.987,-0.121 -1.993,-0.126 -2,-0.13 -2.007,-0.134 -2.014,-0.137 -2.021,-0.14 -2.029,-0.143 -2.036,-0.145 -2.044,-0.147 -2.052,-0.148 -2.059,-0.149 -2.067,-0.15 -2.875,-0.15 -2.875,0.15 -2.067,0.15
  Top Layer region: -2.059,1.149 -2.052,1.148 -2.044,1.147 -2.036,1.145 -2.029,1.143 -2.021,1.14 -2.014,1.137 -2.007,1.134 -2,1.13 -1.993,1.126 -1.987,1.121 -1.981,1.117 -1.975,1.111 -1.969,1.106 -1.964,1.1 -1.958,1.094 -1.954,1.088 -1.949,1.082 -1.945,1.075 -1.941,1.068 -1.938,1.061 -1.935,1.054 -1.932,1.046 -1.93,1.039 -1.928,1.031 -1.927,1.023 -1.926,1.016 -1.925,1.008 -1.925,1 -1.925,0.992 -1.926,0.984 -1.927,0.977 -1.928,0.969 -1.93,0.961 -1.932,0.954 -1.935,0.946 -1.938,0.939 -1.941,0.932 -1.945,0.925 -1.949,0.918 -1.954,0.912 -1.958,0.906 -1.964,0.9 -1.969,0.894 -1.975,0.889 -1.981,0.883 -1.987,0.879 -1.993,0.874 -2,0.87 -2.007,0.866 -2.014,0.863 -2.021,0.86 -2.029,0.857 -2.036,0.855 -2.044,0.853 -2.052,0.852 -2.059,0.851 -2.067,0.85 -2.875,0.85 -2.875,1.15 -2.067,1.15
  Top Layer region: -2.059,1.649 -2.052,1.648 -2.044,1.647 -2.036,1.645 -2.029,1.643 -2.021,1.64 -2.014,1.637 -2.007,1.634 -2,1.63 -1.993,1.626 -1.987,1.621 -1.981,1.617 -1.975,1.611 -1.969,1.606 -1.964,1.6 -1.958,1.594 -1.954,1.588 -1.949,1.582 -1.945,1.575 -1.941,1.568 -1.938,1.561 -1.935,1.554 -1.932,1.546 -1.93,1.539 -1.928,1.531 -1.927,1.523 -1.926,1.516 -1.925,1.508 -1.925,1.5 -1.925,1.492 -1.926,1.484 -1.927,1.477 -1.928,1.469 -1.93,1.461 -1.932,1.454 -1.935,1.446 -1.938,1.439 -1.941,1.432 -1.945,1.425 -1.949,1.418 -1.954,1.412 -1.958,1.406 -1.964,1.4 -1.969,1.394 -1.975,1.389 -1.981,1.383 -1.987,1.379 -1.993,1.374 -2,1.37 -2.007,1.366 -2.014,1.363 -2.021,1.36 -2.029,1.357 -2.036,1.355 -2.044,1.353 -2.052,1.352 -2.059,1.351 -2.067,1.35 -2.875,1.35 -2.875,1.65 -2.067,1.65
  Top Layer region: -1.484,-1.926 -1.477,-1.927 -1.469,-1.928 -1.461,-1.93 -1.454,-1.932 -1.446,-1.935 -1.439,-1.938 -1.432,-1.941 -1.425,-1.945 -1.418,-1.949 -1.412,-1.954 -1.406,-1.958 -1.4,-1.964 -1.394,-1.969 -1.389,-1.975 -1.383,-1.981 -1.379,-1.987 -1.374,-1.993 -1.37,-2 -1.366,-2.007 -1.363,-2.014 -1.36,-2.021 -1.357,-2.029 -1.355,-2.036 -1.353,-2.044 -1.352,-2.052 -1.351,-2.059 -1.35,-2.067 -1.35,-2.075 -1.35,-2.875 -1.65,-2.875 -1.65,-2.075 -1.65,-2.067 -1.649,-2.059 -1.648,-2.052 -1.647,-2.044 -1.645,-2.036 -1.643,-2.029 -1.64,-2.021 -1.637,-2.014 -1.634,-2.007 -1.63,-2 -1.626,-1.993 -1.621,-1.987 -1.617,-1.981 -1.611,-1.975 -1.606,-1.969 -1.6,-1.964 -1.594,-1.958 -1.588,-1.954 -1.582,-1.949 -1.575,-1.945 -1.568,-1.941 -1.561,-1.938 -1.554,-1.935 -1.546,-1.932 -1.539,-1.93 -1.531,-1.928 -1.523,-1.927 -1.516,-1.926 -1.508,-1.925 -1.492,-1.925
  Top Layer region: -0.35,2.075 -0.35,2.067 -0.351,2.059 -0.352,2.052 -0.353,2.044 -0.355,2.036 -0.357,2.029 -0.36,2.021 -0.363,2.014 -0.366,2.007 -0.37,2 -0.374,1.993 -0.379,1.987 -0.383,1.981 -0.389,1.975 -0.394,1.969 -0.4,1.964 -0.406,1.958 -0.412,1.954 -0.418,1.949 -0.425,1.945 -0.432,1.941 -0.439,1.938 -0.446,1.935 -0.454,1.932 -0.461,1.93 -0.469,1.928 -0.477,1.927 -0.484,1.926 -0.492,1.925 -0.508,1.925 -0.516,1.926 -0.523,1.927 -0.531,1.928 -0.539,1.93 -0.546,1.932 -0.554,1.935 -0.561,1.938 -0.568,1.941 -0.575,1.945 -0.582,1.949 -0.588,1.954 -0.594,1.958 -0.6,1.964 -0.606,1.969 -0.611,1.975 -0.617,1.981 -0.621,1.987 -0.626,1.993 -0.63,2 -0.634,2.007 -0.637,2.014 -0.64,2.021 -0.643,2.029 -0.645,2.036 -0.647,2.044 -0.648,2.052 -0.649,2.059 -0.65,2.067 -0.65,2.075 -0.65,2.875 -0.35,2.875
  Top Layer region: 0.15,2.075 0.15,2.067 0.149,2.059 0.148,2.052 0.147,2.044 0.145,2.036 0.143,2.029 0.14,2.021 0.137,2.014 0.134,2.007 0.13,2 0.126,1.993 0.121,1.987 0.117,1.981 0.111,1.975 0.106,1.969 0.1,1.964 0.094,1.958 0.088,1.954 0.082,1.949 0.075,1.945 0.068,1.941 0.061,1.938 0.054,1.935 0.046,1.932 0.039,1.93 0.031,1.928 0.023,1.927 0.016,1.926 0.008,1.925 -0.008,1.925 -0.016,1.926 -0.023,1.927 -0.031,1.928 -0.039,1.93 -0.046,1.932 -0.054,1.935 -0.061,1.938 -0.068,1.941 -0.075,1.945 -0.082,1.949 -0.088,1.954 -0.094,1.958 -0.1,1.964 -0.106,1.969 -0.111,1.975 -0.117,1.981 -0.121,1.987 -0.126,1.993 -0.13,2 -0.134,2.007 -0.137,2.014 -0.14,2.021 -0.143,2.029 -0.145,2.036 -0.147,2.044 -0.148,2.052 -0.149,2.059 -0.15,2.067 -0.15,2.075 -0.15,2.875 0.15,2.875
  Top Layer region: -2.059,-1.351 -2.052,-1.352 -2.044,-1.353 -2.036,-1.355 -2.029,-1.357 -2.021,-1.36 -2.014,-1.363 -2.007,-1.366 -2,-1.37 -1.993,-1.374 -1.987,-1.379 -1.981,-1.383 -1.975,-1.389 -1.969,-1.394 -1.964,-1.4 -1.958,-1.406 -1.954,-1.412 -1.949,-1.418 -1.945,-1.425 -1.941,-1.432 -1.938,-1.439 -1.935,-1.446 -1.932,-1.454 -1.93,-1.461 -1.928,-1.469 -1.927,-1.477 -1.926,-1.484 -1.925,-1.492 -1.925,-1.5 -1.925,-1.508 -1.926,-1.516 -1.927,-1.523 -1.928,-1.531 -1.93,-1.539 -1.932,-1.546 -1.935,-1.554 -1.938,-1.561 -1.941,-1.568 -1.945,-1.575 -1.949,-1.582 -1.954,-1.588 -1.958,-1.594 -1.964,-1.6 -1.969,-1.606 -1.975,-1.611 -1.981,-1.617 -1.987,-1.621 -1.993,-1.626 -2,-1.63 -2.007,-1.634 -2.014,-1.637 -2.021,-1.64 -2.029,-1.643 -2.036,-1.645 -2.044,-1.647 -2.052,-1.648 -2.059,-1.649 -2.067,-1.65 -2.875,-1.65 -2.875,-1.35 -2.067,-1.35
  Top Layer region: -2.059,-0.851 -2.052,-0.852 -2.044,-0.853 -2.036,-0.855 -2.029,-0.857 -2.021,-0.86 -2.014,-0.863 -2.007,-0.866 -2,-0.87 -1.993,-0.874 -1.987,-0.879 -1.981,-0.883 -1.975,-0.889 -1.969,-0.894 -1.964,-0.9 -1.958,-0.906 -1.954,-0.912 -1.949,-0.918 -1.945,-0.925 -1.941,-0.932 -1.938,-0.939 -1.935,-0.946 -1.932,-0.954 -1.93,-0.961 -1.928,-0.969 -1.927,-0.977 -1.926,-0.984 -1.925,-0.992 -1.925,-1 -1.925,-1.008 -1.926,-1.016 -1.927,-1.023 -1.928,-1.031 -1.93,-1.039 -1.932,-1.046 -1.935,-1.054 -1.938,-1.061 -1.941,-1.068 -1.945,-1.075 -1.949,-1.082 -1.954,-1.088 -1.958,-1.094 -1.964,-1.1 -1.969,-1.106 -1.975,-1.111 -1.981,-1.117 -1.987,-1.121 -1.993,-1.126 -2,-1.13 -2.007,-1.134 -2.014,-1.137 -2.021,-1.14 -2.029,-1.143 -2.036,-1.145 -2.044,-1.147 -2.052,-1.148 -2.059,-1.149 -2.067,-1.15 -2.875,-1.15 -2.875,-0.85 -2.067,-0.85
  Top Layer region: -0.984,-1.926 -0.977,-1.927 -0.969,-1.928 -0.961,-1.93 -0.954,-1.932 -0.946,-1.935 -0.939,-1.938 -0.932,-1.941 -0.925,-1.945 -0.918,-1.949 -0.912,-1.954 -0.906,-1.958 -0.9,-1.964 -0.894,-1.969 -0.889,-1.975 -0.883,-1.981 -0.879,-1.987 -0.874,-1.993 -0.87,-2 -0.866,-2.007 -0.863,-2.014 -0.86,-2.021 -0.857,-2.029 -0.855,-2.036 -0.853,-2.044 -0.852,-2.052 -0.851,-2.059 -0.85,-2.067 -0.85,-2.075 -0.85,-2.875 -1.15,-2.875 -1.15,-2.075 -1.15,-2.067 -1.149,-2.059 -1.148,-2.052 -1.147,-2.044 -1.145,-2.036 -1.143,-2.029 -1.14,-2.021 -1.137,-2.014 -1.134,-2.007 -1.13,-2 -1.126,-1.993 -1.121,-1.987 -1.117,-1.981 -1.111,-1.975 -1.106,-1.969 -1.1,-1.964 -1.094,-1.958 -1.088,-1.954 -1.082,-1.949 -1.075,-1.945 -1.068,-1.941 -1.061,-1.938 -1.054,-1.935 -1.046,-1.932 -1.039,-1.93 -1.031,-1.928 -1.023,-1.927 -1.016,-1.926 -1.008,-1.925 -0.992,-1.925
  silkscreen extent -3.6,-2.5 2.5,2.5, body extent -2.5,-2.5 2.5,2.5, height 0.8
IND_1210 [mm]
  rect 1.5x2.7 smd: 1(-1.45,0) 2(1.45,0)
  silkscreen extent -2.44,-1.6 2.44,1.6, body extent -1.7,-1.4 1.7,1.4, height 2.5
IND_FXL06 [mm] "Precision Wire Wound Inductor, 2-Leads, Body 4,50x4,00mm, IPC Medium Density"
  rect 2.35x3.5 smd: 1(-3.035,0) 2(3.035,0)
  silkscreen extent -3.8,-3.6 3.8,3.6, body extent -3.5,-3.3 3.5,3.3, height 2.8
LED_0805 [mm]
  rect 1.15x1.4 smd: 1(-1.025,0) 2(1.025,0)
  silkscreen extent -2.14,-0.93 1.81,1.69, body extent -1.03,-0.64 1.04,0.64, height 1.4
Push_Button [mm] "Chip Resistor, 2-Leads, Body 5,20x3,30mm, IPC Medium Density"
  rect 2x1.7 smd: 1(-4,0)
  rect 2x1.73 smd: 2(4,0)
  silkscreen extent -3,-1.9 3,1.9, body extent -2.9,-1.8 2.9,1.8, height 3.7
RES_0805 [mm]
  rect 1.2x1.45 smd: 1(-1,0) 2(1,0)
  silkscreen extent -1.83,-0.95 1.83,0.95, body extent -1.02,-0.7 1.02,0.7, height 1.3
SMAF [mm]
  rect 2.2x2 smd: 1(-2.2,0) 2(2.2,0)
  silkscreen extent -2.42,-1.6 2.42,1.6, body extent -2.28,-1.5 2.3,1.5, height 2.5
SOIC8_T [mm] "SOIC, 8-Leads, Body 4.90x3.90mm, Pitch 1.27mm, Thermal Pad 3.10x2.40mm, IPC Medium Density"
  rect 1.8x0.65 smd: 1(-2.9,1.905) 2(-2.9,0.635) 3(-2.9,-0.635) 4(-2.9,-1.905) 5(2.9,-1.905) 6(2.9,-0.635) 7(2.9,0.635) 8(2.9,1.905)
  rect 0.3x0.3 smd: 9(0,0)
  silkscreen extent -3.02,-2.5 1.6,2.9, body extent -2,-2.5 2,2.5, height 1.8
SOP65P640X120-24N [mm]
  rrect25% 1.57x0.41 smd: 1(-2.87,3.575) 2(-2.87,2.925) 3(-2.87,2.275) 4(-2.87,1.625) 5(-2.87,0.975) 6(-2.87,0.325) 7(-2.87,-0.325) 8(-2.87,-0.975) 9(-2.87,-1.625) 10(-2.87,-2.275) 11(-2.87,-2.925) 12(-2.87,-3.575) 13(2.87,-3.575) 14(2.87,-2.925) 15(2.87,-2.275) 16(2.87,-1.625) 17(2.87,-0.975) 18(2.87,-0.325) 19(2.87,0.325) 20(2.87,0.975) 21(2.87,1.625) 22(2.87,2.275) 23(2.87,2.925) 24(2.87,3.575)
  silkscreen extent -4.54,-4.1 2.2,4.1, body extent -3.2,-3.9 3.2,3.9, height 1.2
SOT23-3 [mm] "SOT23, 5-Leads, Body 2,95x2,45mm, Pitch 0,95mm, IPC Medium Density"
  rect 1x0.6 smd: 1(1.15,-0.95) 2(1.15,0.95) 3(-1.15,0)
  silkscreen extent -0.45,-1.87 1.38,1.55, body extent -0.85,-1.55 0.85,1.55, height 1.3
SOT223-4 [mm] "SOT223, 4-Leads, Body 6,50x7,00mm (avg), Pitch 2,30mm, IPC Medium Density"
  rect 2.3x1 smd: 1(-3,2.3) 2(-3,0) 3(-3,-2.3)
  rect 2.3x3.25 smd: 4(3,0)
  silkscreen extent -3.12,-3.35 1.55,3.47, body extent -1.85,-3.35 1.85,3.35, height 1.8
TE_1-1393210-3 [mm]
  rect 1.635x1.635 / inner round 1.635 / far side rect 1.635x1.635 hole 1.09: A1(0,0)
  round 1.635 hole 1.09: A2(10.16,0)
  round 2.97 hole 1.98: C(-3.81,12.7)
  round 3.076 hole 2.06: NO(13.97,15.24)
  silkscreen extent -8.08,-7.11 19.35,25.4, body extent -8,-7.11 19.43,25.4, height 20.4
XCVR_ESP32-S3-WROOM-1-N16R2 [mm]
  rect 1.5x0.9 smd: 2(-8.75,3.99) 3(-8.75,2.72) 4(-8.75,1.45) 5(-8.75,0.18) 6(-8.75,-1.09) 7(-8.75,-2.36) 8(-8.75,-3.63) 9(-8.75,-4.9) 10(-8.75,-6.17) 11(-8.75,-7.44) 12(-8.75,-8.71) 13(-8.75,-9.98) 14(-8.75,-11.25) 27(8.75,-11.25) 28(8.75,-9.98) 29(8.75,-8.71) 30(8.75,-7.44) 31(8.75,-6.17) 32(8.75,-4.9) 33(8.75,-3.63) 34(8.75,-2.36) 35(8.75,-1.09) 36(8.75,0.18) 37(8.75,1.45) 38(8.75,2.72) 39(8.75,3.99) GND(-8.75,5.26) GND(8.75,5.26)
  rect 0.9x1.5 smd: 15(-6.985,-12.5) 16(-5.715,-12.5) 17(-4.445,-12.5) 18(-3.175,-12.5) 19(-1.905,-12.5) 20(-0.635,-12.5) 21(0.635,-12.5) 22(1.905,-12.5) 23(3.175,-12.5) 24(4.445,-12.5) 25(5.715,-12.5) 26(6.985,-12.5)
  round 0.4 hole 0.2 mask+0: 41_10(-1.5,-1.76) 41_11(-2.9,-1.76) 41_12(-0.1,-1.76) 41_13(-2.9,-3.16) 41_14(-1.5,-3.16) 41_15(-0.1,-3.16) 41_16(-2.2,-1.06) 41_17(-0.8,-1.06) 41_18(-2.2,-2.46) 41_19(-0.8,-2.46) 41_20(-2.2,-3.86) 41_21(-0.8,-3.86)
  rect 0.9x0.9 smd: GND(-2.9,-2.46) GND(-2.9,-1.06) GND(-2.9,-3.86) GND(-1.5,-1.06) GND(-1.5,-2.46) GND(-1.5,-3.86) GND(-0.1,-1.06) GND(-0.1,-2.46) GND(-0.1,-3.86)
  Keep-Out Layer region: 9,6.75 -9,6.75 -9,12.75 9,12.75
  Keep-Out Layer region: 9,6.75 -9,6.75 -9,12.75 9,12.75
  silkscreen extent -10.3,-12.75 9,12.75, body extent -9,-12.75 9,12.75, height 3.25
XT30PW-M30.G.Y [mm]
  round 2.55 hole 1.7: N(2.627,-5.809)
  rect 2.55x2.55 / inner round 2.55 / far side rect 2.55x2.55 hole 1.7: P(-2.373,-5.809)
  round 1.508 hole 1: S1(5.627,4.191) S2(-5.373,4.191)
  silkscreen extent -6.52,-8.56 6.78,7.14, body extent -6.52,-6.81 6.78,7.14, height 5